# Altium PCB CANLED.PcbDoc
Units mil, origin at the board's own origin, x right, y up, seen from the top; angles counter-clockwise.
Board outline 2160 x 2780 mil, 2 copper layers (Top Layer, Bottom Layer); 11 components, 12 nets, 86 pads, 2 vias.
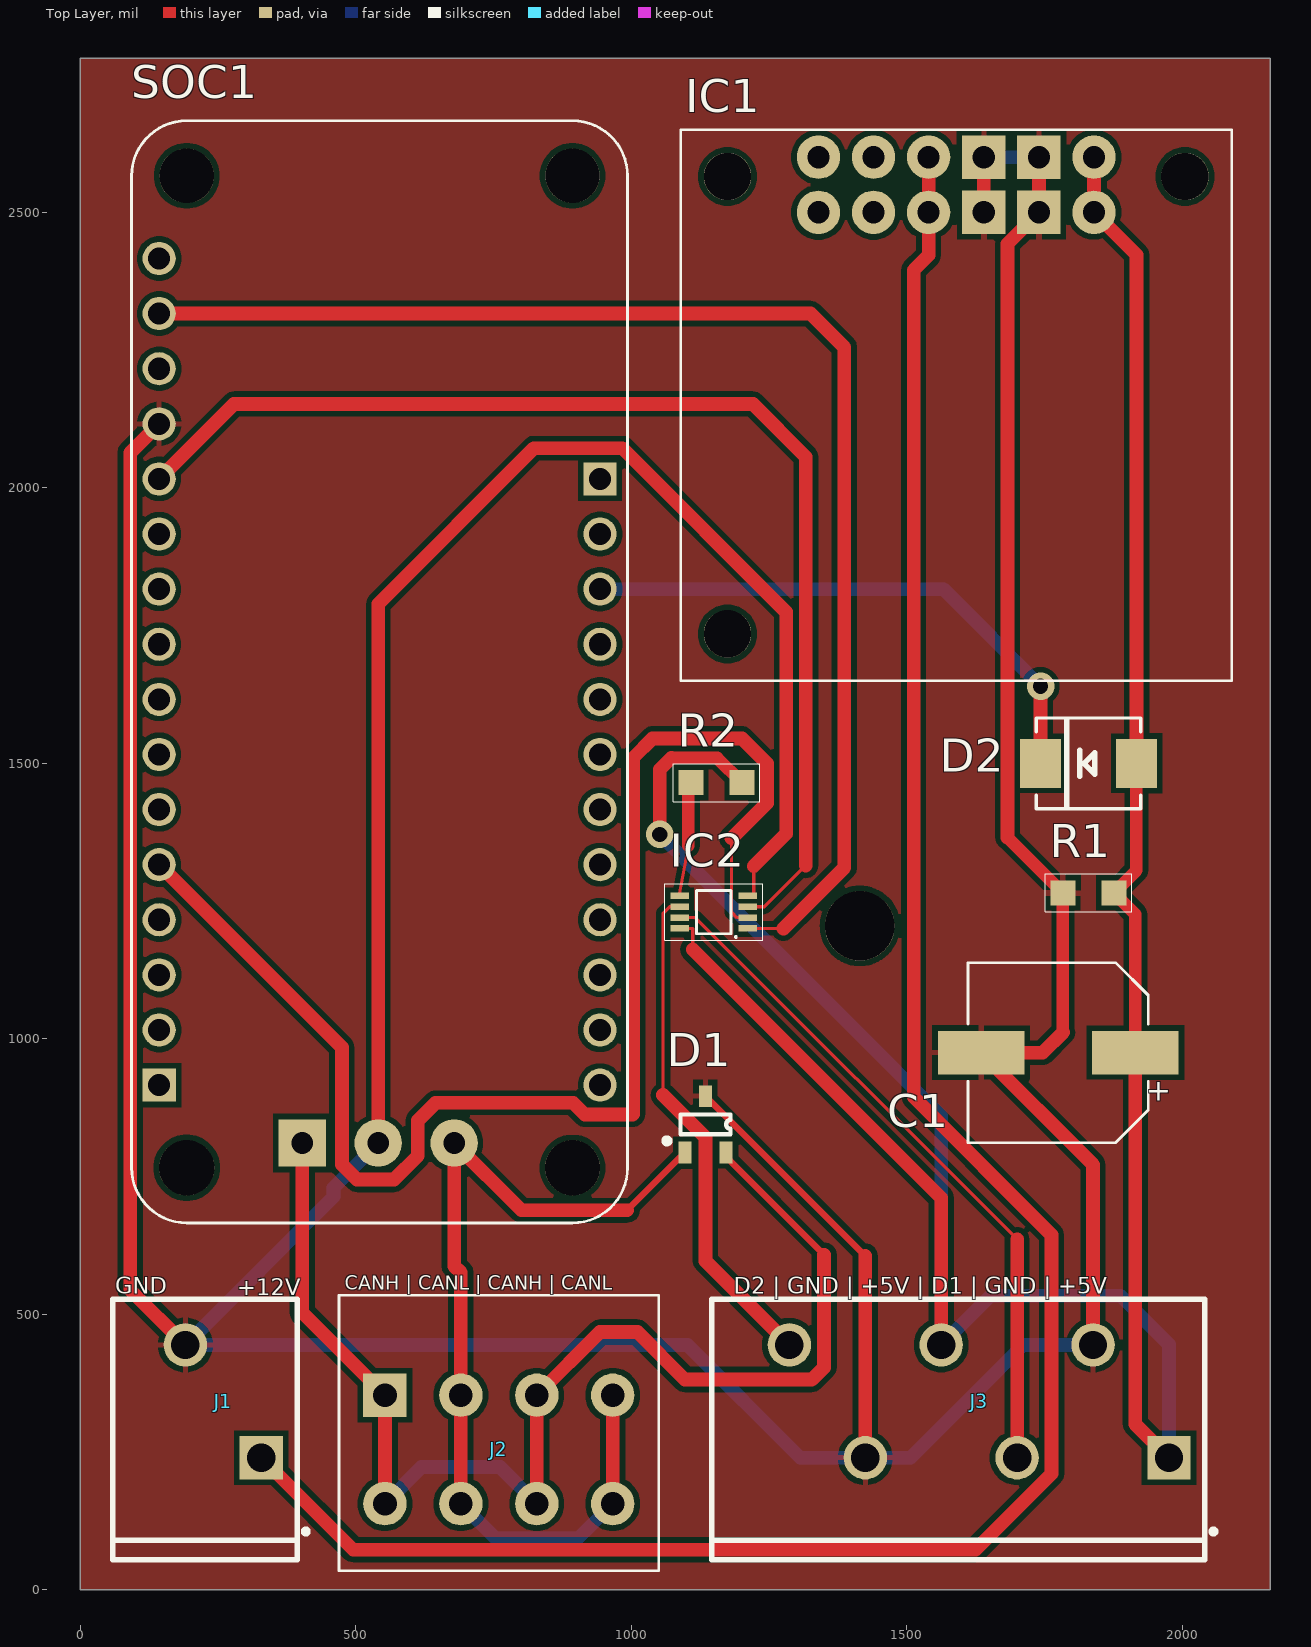
[diagram p0: Top Layer view]
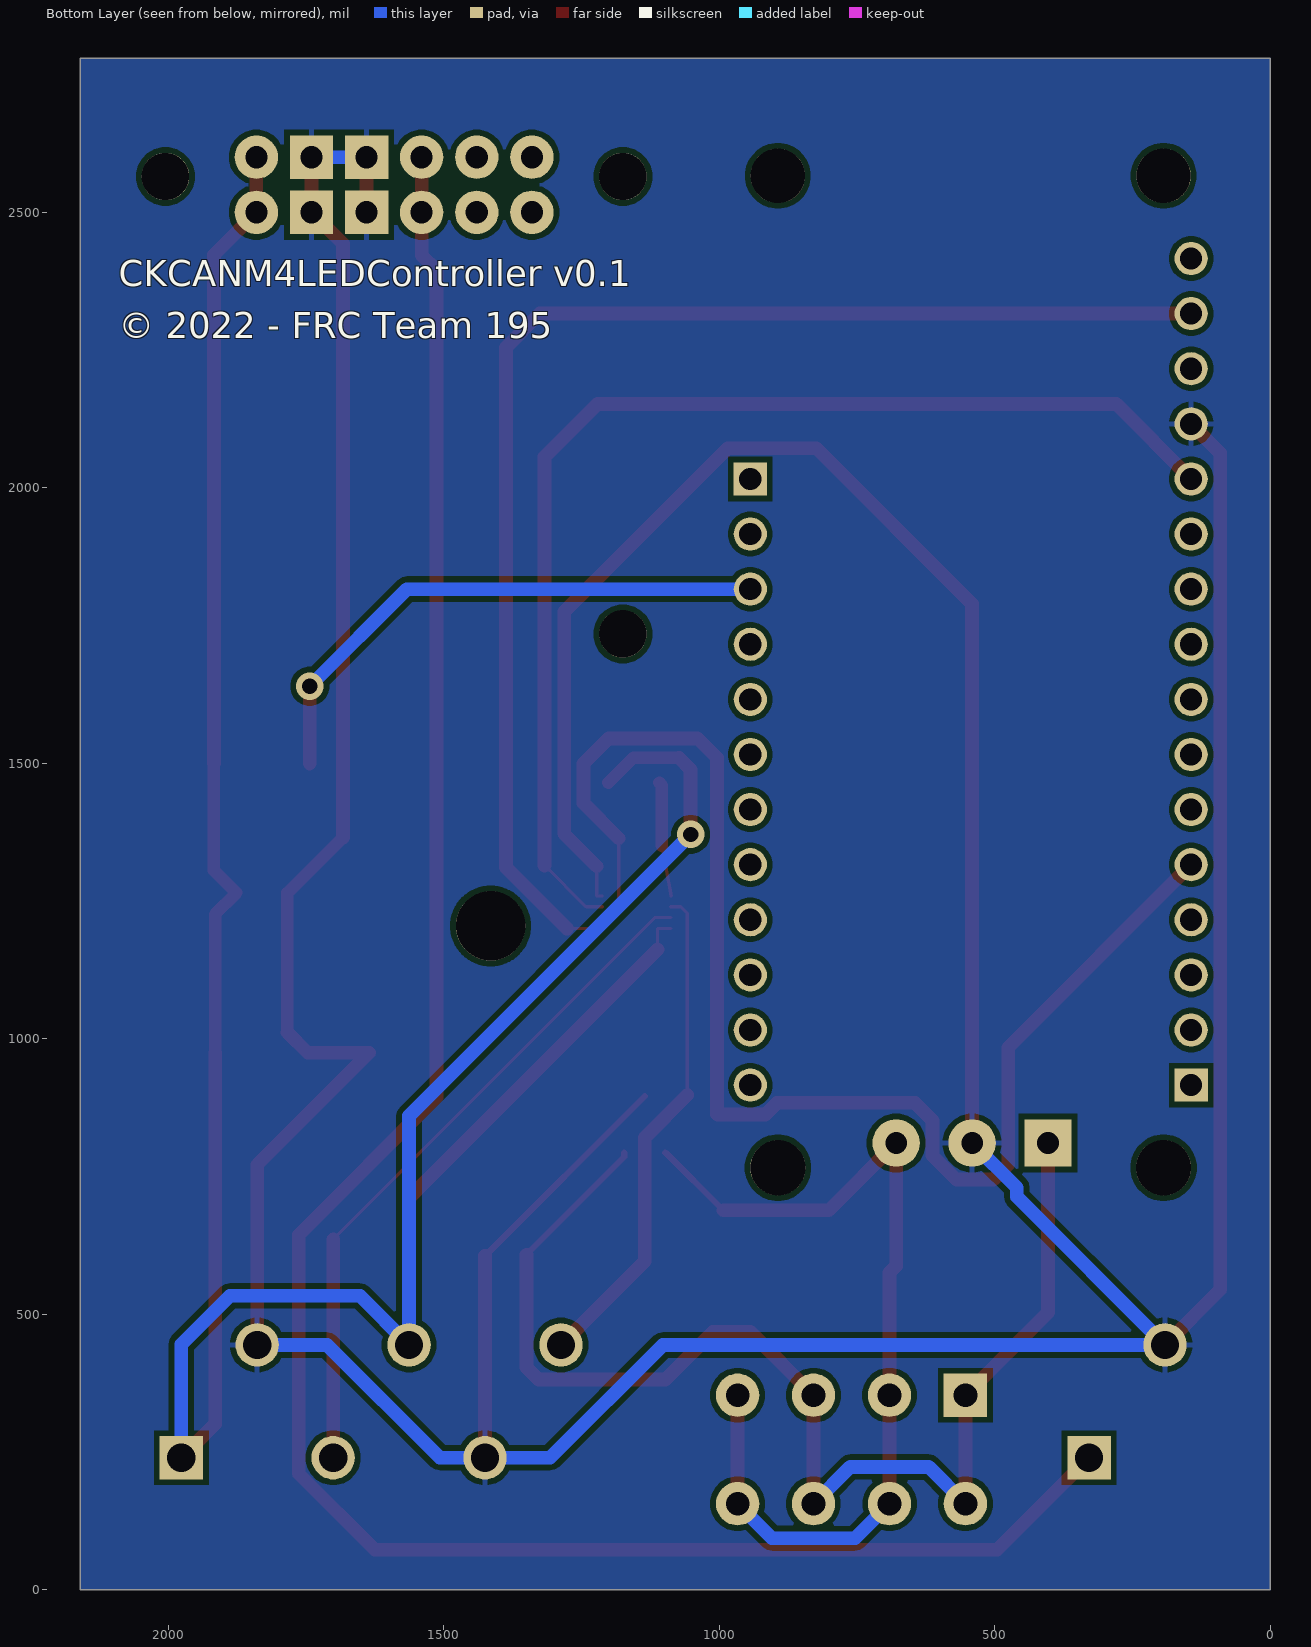
[diagram p1: Bottom Layer view, seen from below]

## Layer stack, top to bottom
Top Solder: solder mask 0.4, Solder Resist, Dk 3.5
Top Layer: signal copper 1.4
Dielectric 1: dielectric 12.6, FR-4, Dk 4.8
Bottom Layer: signal copper 1.4
Bottom Solder: solder mask 0.4, Solder Resist, Dk 3.5

## Board outline
0,0 2160,0 2160,2780 0,2780

## Design rules (kind name [scope] priority, off if disabled: settings)
Clearance [All] p1: gap=10 ignorepadtopadclearanceinfootprint=FALSE except(0: Arc-Hole Track-Hole SMDPad-Hole THPad-Hole Via-Hole Fill-Hole Poly-Hole Region-Hole Text-Hole; 5: Arc-SMDPad Track-SMDPad SMDPad-SMDPad)
PolygonConnect [All] p1: connectstyle=Relief reliefconductorwidth=10 reliefentries=4 polygonreliefangle="90 Angle" airgapwidth=10
RoomDefinition CANLED [InComponentClass('CANLED')] p1: confinementstyle=ConfineIn formatcopy=TRUE lockcomponents=FALSE outline 10,-5 2165,-5 2165,2770 10,2770
RoutingVias [All] p1: holewidth=28 width=50 viastyle="Through Hole" minholewidth=28 minwidth=50 maxholewidth=28 maxwidth=50
SMDNeckDown [All] p1: percent=50.000
SolderMaskExpansion [All] p1: expansion=4 istentingtop=FALSE
Width [All] p1: maxlimit=50 minlimit=5 preferedwidth=25 minimp=50.000000 maximp=50.000000 favimp=50.000000
30 further rules are at their usual default settings.

## Components (designator, comment, footprint, x,y, rotation, side; value= is the part's Value field where it differs from the comment)
C1 "470uF" CAP_EEE0JA471UAP 1775,975 r180 top
D1 "DESD2CAN2SOQ-7" SOT23-3 1135,845 r180 top
D2 "LSM115JE3/TR13" DO-214BA_MCH 1830,1500 r0 top
IC1 "D36V50Fx" D36V50FX 1340,2500 r90 top
IC2 "74LVC2T45DC,125" SOP50P310X100-8N 1150,1230 r180 top
J1 "Power" 1-2834011-2 260,342.36 r270 top
J2 "CAN" 1885200000 760,255 r0 top
J3 "LED Connector" 1-2834011-6 1631.69,342.36 r270 top
R1 "100K" RES_ERJ6ENF1003V 1830,1265 r0 top
R2 "100K" RES_ERJ6ENF1003V 1155,1465 r0 top
SOC1 "FEATHER_M4_CAN" FEATHER_M4_EXPRESS_CAN 543.66,1666.18 r270 top

## Footprints (in the part's own frame and the unit in brackets; to place one, negate y for a bottom-side part, rotate by r counter-clockwise, add the part's x,y. Pads: shape width x height; smd on the part's side, far side on the other; paste and mask are expansions set on the pad)
1-2834011-2 [mm]
  rect 2x2 hole 1.3: 1(2.6,1.75)
  round 2 hole 1.3: 2(-2.6,-1.75)
  silkscreen extent -4.7,-5.1 7.3,3.9, body extent -4.7,-5.15 7.3,3.35, height 12.94
1-2834011-6 [mm]
  rect 2x2 hole 1.3: 1(2.6,8.75)
  round 2 hole 1.3: 2(-2.6,5.25) 3(2.6,1.75) 4(-2.6,-1.75) 5(2.6,-5.25) 6(-2.6,-8.75)
  silkscreen extent -4.7,-12.32 7.3,10.9, body extent -4.73,-12.27 7.27,10.23, height 12.94
1885200000 [mm]
  round 2 hole 1.092: 1(-5.25,-2.5) 2(-1.75,-2.5) 2(-1.75,2.5) 3(1.75,-2.5) 3(1.75,2.5) 4(5.25,-2.5) 4(5.25,2.5)
  rect 2x2 hole 1.092: 1(-5.25,2.5)
  silkscreen extent -7.37,-5.59 7.37,7.11, body extent -7.37,-5.59 7.33,7.11, height 13.17
CAP_EEE0JA471UAP [mm]
  rect 4x2 smd: 1(-3.55,0) 2(3.55,0)
  silkscreen extent -4.15,-4.15 4.15,4.15, body extent -4.85,-4.15 4.85,4.15, height 10.2
D36V50FX [mm]
  round 2 hole 1.02: 1(0,-12.7) 1(2.54,-12.7) 3(0,-5.08) 3(2.54,-5.08) 4(0,-2.54) 4(2.54,-2.54) 5(0,0) 6(2.54,0)
  rect 2x2 hole 1.02: 2(0,-7.62) 2(0,-10.16) 2(2.54,-7.62) 2(2.54,-10.16)
  round 2.184 hole 2.184: 9(1.651,-16.891) 10(1.651,4.191) 11(-19.431,4.191)
  silkscreen extent -21.59,-19.05 3.81,6.35, body extent -21.59,-19.05 3.81,6.35, height 12.77
DO-214BA_MCH [mil]
  rect 74x89 smd paste+0 mask+0: 1(-87,0) 2(87,0)
  silkscreen extent -95,-82 95,82, body extent -103,-51 103,51, height 117
FEATHER_M4_EXPRESS_CAN [mm]
  rect 1.53x1.53 hole 1.02: P1_1(19.05,-10.16) P2_1(-8.89,10.16)
  round 1.53 hole 1.02: P1_2(16.51,-10.16) P1_3(13.97,-10.16) P1_4(11.43,-10.16) P1_5(8.89,-10.16) P1_6(6.35,-10.16) P1_7(3.81,-10.16) P1_8(1.27,-10.16) P1_9(-1.27,-10.16) P1_10(-3.81,-10.16) P1_11(-6.35,-10.16) P1_12(-8.89,-10.16) P1_13(-11.43,-10.16) P1_14(-13.97,-10.16) P1_15(-16.51,-10.16) P1_16(-19.05,-10.16) P2_2(-6.35,10.16) P2_3(-3.81,10.16) P2_4(-1.27,10.16) P2_5(1.27,10.16) P2_6(3.81,10.16) P2_7(6.35,10.16) P2_8(8.89,10.16) P2_9(11.43,10.16) P2_10(13.97,10.16) P2_11(16.51,10.16) P2_12(19.05,10.16)
  rect 2.184x2.184 hole 1: P3_1(21.717,-3.564)
  round 2.184 hole 1: P3_2(21.717,-0.063) P3_3(21.717,3.437)
  round 2.5 hole 2.5: P$1(-22.86,8.89) P$2(-22.86,-8.89)
  round 2.54 hole 2.54: ""(22.86,8.89) ""(22.86,-8.89)
  silkscreen extent -25.4,-11.43 25.4,11.43, body extent -25.46,-11.43 25.4,11.43, height 9.89
RES_ERJ6ENF1003V [mm]
  rect 1.15x1.15 smd: 1(-1.175,0) 2(1.175,0)
  silkscreen extent -2,-0.87 2,0.87, body extent -1,-0.63 1,0.63, height 0.61
SOP50P310X100-8N [mm]
  rect 0.85x0.3 smd: 1(-1.575,0.75) 2(-1.575,0.25) 3(-1.575,-0.25) 4(-1.575,-0.75) 5(1.575,-0.75) 6(1.575,-0.25) 7(1.575,0.25) 8(1.575,0.75)
  silkscreen extent -2.25,-1.3 2.25,1.3, body extent -1.55,-1 1.55,1, height 1
SOT23-3 [mm] "SOT23-3"
  rect 0.6x1 smd: 1(0.95,1.3) 2(-0.95,1.3) 3(0,-1.3)
  silkscreen extent -1.15,-0.45 1.9,0.89, body extent -1.45,-1.4 1.45,1.4, height 1.3

## Part data
C1: library part EEE0JA471UAP, "470ÂµF 6.3V Aluminum Electrolytic Capacitors Radial, Can - SMD 1000 Hrs @ 85Â°C", Package="RADIAL-2 Panasonic", Availability="In Stock", Check_prices=https://www.snapeda.com/parts/EEE-0JA471UAP/Panasonic/view-part/2352035/?ref=eda, MF=Panasonic, MP=EEE-0JA471UAP, Price=None, Purchase-URL=https://pricing.snapeda.com/search/part/EEE-0JA471UAP/?ref=eda, SnapEDA_Link=https://www.snapeda.com/parts/EEE-0JA471UAP/Panasonic/view-part/2352035/?ref=snap
D1: "ESD Suppressor Diode TVS Bi-Dir 24V Automotive 3-Pin SOT-23 T/R", Case/Package=TO-236-3, Clamping Voltage=41V, Manufacturer=Diodes, Max Operating Temperature=150°C, Min Breakdown Voltage=25.4V, Min Operating Temperature=-65°C, Peak Pulse Current=5A, Peak Pulse Power=230W, Power Line Protection=No, Resistor Type=Zener, Reverse Standoff Voltage=24V, Supplier Part Number 1=DESD2CAN2SOQ-7DICT-ND, Category="TVS Diodes", ComponentLink1Description=http://www.farnell.com/datasheets/2814365.pdf?src-supplier=Farnell, ComponentLink1URL=http://www.farnell.com/datasheets/2814365.pdf?src-supplier=Farnell, ComponentLink2Description=http://www.mouser.com/ds/2/115/DESD2CAN2SOQ-520157.pdf?src-supplier=Mouser, ComponentLink2URL=http://www.mouser.com/ds/2/115/DESD2CAN2SOQ-520157.pdf?src-supplier=Mouser, ComponentLink3Description=https://www.diodes.com/assets/Datasheets/DESD2CAN2SOQ.pdf?src-supplier=Digi-Key, ComponentLink3URL=https://www.diodes.com/assets/Datasheets/DESD2CAN2SOQ.pdf?src-supplier=Digi-Key, ComponentLink4Description=http://www.farnell.com/datasheets/2814365.pdf?src-supplier=Element14, ComponentLink4URL=http://www.farnell.com/datasheets/2814365.pdf?src-supplier=Element14, ComponentLink5Description=http://www.farnell.com/datasheets/2814365.pdf?src-supplier=Newark, ComponentLink5URL=http://www.farnell.com/datasheets/2814365.pdf?src-supplier=Newark, Manufacturer Part Number=DESD2CAN2SOQ-7, Mount="Surface Mount", Number of Bidirectional Channels=2, Packaging="Tape and Reel", Pricing 1="1=0.47000, 10=0.38300, 100=0.26050, 500=0.19536, 1000=0.14652 (USD)", RoHS=Yes, Stock 1=91038, Supplier 1=Digi-Key
D2: "No Description Available", Mfr_Name=Microchip, Copyright="Copyright (C) 2022 Ultra Librarian. All rights reserved.", Digi-Key_Part_Number_1=LSM115JE3/TR13TR-ND, Digi-Key_Part_Number_2=LSM115JE3/TR13CT-ND, Digi-Key_Part_Number_3=LSM115JE3/TR13DKR-ND, Manufacturer_Part_Number=LSM115JE3/TR13, RefDes=RefDes, Type=DEV
IC2: "Voltage Level Translator Bidirectional 1 Circuit 2 Channel 420Mbps 8-VSSOP", Package="VSSOP8-8 Nexperia USA Inc.", Availability=Good, Check_prices=https://www.snapeda.com/parts/74LVC2T45DC,125/Nexperia/view-part/287401/?ref=eda, MF="Nexperia USA", MP=74LVC2T45DC,125, Price=None, Purchase-URL=https://pricing.snapeda.com/search/part/74LVC2T45DC,125/?ref=eda, SnapEDA_Link=https://www.snapeda.com/parts/74LVC2T45DC,125/Nexperia/view-part/287401/?ref=snap
J1: library part 1-2834011-2, "Conn PC Terminal Block RCP 2 POS 3.5mm Solder ST Thru-Hole 6A/Contact Box/Carton", Contact Current Rating=6A, Manufacturer="TE Connectivity", Supplier Part Number 1=A123848-ND, Voltage Rating=300V, Approvals=UL, Category="Terminal Blocks", ComponentLink1Description=http://www.te.com/commerce/DocumentDelivery/DDEController?Action=srchrtrv&DocNm=1-1773872-7_ModularScrewlessTerminalBloc&DocType=DS&DocLang=English&src-supplier=Digi-Key, ComponentLink1URL=http://www.te.com/commerce/DocumentDelivery/DDEController?Action=srchrtrv&DocNm=1-1773872-7_ModularScrewlessTerminalBloc&DocType=DS&DocLang=English&src-supplier=Digi-Key, ComponentLink2Description=http://www.farnell.com/datasheets/2057753.pdf?src-supplier=Element14, ComponentLink2URL=http://www.farnell.com/datasheets/2057753.pdf?src-supplier=Element14, ComponentLink3Description=http://www.farnell.com/datasheets/2296738.pdf?src-supplier=Newark, ComponentLink3URL=http://www.farnell.com/datasheets/2296738.pdf?src-supplier=Newark, Connector Type=Receptacle,Connector, Contact Plating=Tin,Lead, Current Rating=6A, Lead Free="Lead Free", Manufacturer Part Number=1-2834011-2, Number of Pins=2, Number of Positions=2, Packaging=Box, Pricing 1="1=0.68000, 10=0.42600, 25=0.36440, 50=0.32780, 100=0.32090, 250=0.27308, 500=0.25942, 1000=0.23212, 5000=0.18206 (USD)", REACH SVHC=Unknown, RoHS=Yes, RoHS Compliant=Yes, Sealable="No (Without)", Stock 1=40747, Supplier 1=Digi-Key, Termination="Through Hole", Wire/Cable Gauge=14AWG
J2: library part 1885200000
J3: library part 1-2834011-6, "Conn PC Terminal Block 6 POS 3.5mm Solder ST Thru-Hole 6A/Contact Box/Carton", Contact Current Rating=6A, Manufacturer="TE Connectivity", Supplier Part Number 1=A123851-ND, Approvals=UL, Category="Terminal Blocks", ComponentLink1Description=http://www.te.com/commerce/DocumentDelivery/DDEController?Action=srchrtrv&DocNm=2834011&DocType=Customer+Drawing&DocLang=English&src-supplier=Digi-Key, ComponentLink1URL=http://www.te.com/commerce/DocumentDelivery/DDEController?Action=srchrtrv&DocNm=2834011&DocType=Customer+Drawing&DocLang=English&src-supplier=Digi-Key, Connector Type=Receptacle,Connector, Contact Plating=Tin,Lead, Lead Free="Lead Free", Manufacturer Part Number=1-2834011-6, Number of Pins=6, Packaging=Box, Pricing 1="1=1.42000, 10=1.00100, 25=0.93320, 50=0.84700, 100=0.84320, 250=0.71200, 500=0.67454, 1000=0.59959, 5000=0.49966 (USD)", RoHS=No, Sealable="No (Without)", Stock 1=4797, Supplier 1=Digi-Key, Termination="Through Hole", Wire/Cable Gauge=14AWG
R1 R2: library part ERJ6ENF1003V, Package=None, Availability=Unavailable, MP=ERJ6ENF1003V, Price=None

## Free pads (board coordinates)
  round 125.98 hole 125.98: 12(1415,1205)

## Via types
v1: diameter 50, hole 28, Top Layer to Bottom Layer, 2 vias

## Nets (pads, with @x,y where several pads share a name; then routed paths per layer and width w, separated by ;. In a path a pad name is that pad's centre, name@x,y a point inside that pad or via, vN(x,y) a via of type N, cw(c..) or ccw(c..) an arc to the next point about the centre after c; other vN are vias at no path point)
+3V3: IC2.1 SOC1.P1_15 | length 2433.5
  Top Layer w5.91: IC2.1 1276.47,1200.47
  Top Layer w25: SOC1.P1_15 1325.82,2316.18 1387,2255 1387,1311 1276.47,1200.47
+5V: C1.1 D2.2 IC1.1 IC2.8 J3.1 J3.4 R1.2 R2.2 | length 5541.9
  Top Layer w5.91: IC2.8 1112,1200.47 1112,1162.44
  Top Layer w22.64: 1073.14,1510.14 1156.12,1510.14 R2.2 ; C1.1 1914.76,1226.5 R1.2 1917,1305.74 D2.2
  Top Layer w25: v1(1052,1371) 1052,1489 1073.14,1510.14 ; 1112,1162.44 1562.8,711.65 J3.4 ; IC1.1@1840,2600 1840,2500 1917,2423 D2.2 ; C1.1 1914.76,301.42 J3.1
  Bottom Layer w25: v1(1052,1371) 1562.8,860.2 J3.4 1652.07,534 1888,534 1976.18,445.82 J3.1
+12V: IC1.3 J1.1 | length 4064.2
  Top Layer w25: J1.1 495.9,73 1625,73 1763,211 1763,644.5 1513,894.5 1513,2395 1540,2422 1540,2500 IC1.3@1540,2600
CANH: D1.2 J2.1 J2.3 SOC1.P3_1 | length 2320.9
  Top Layer w11.81: D1.2 1172.4,786 1350,608.4
  Top Layer w25: SOC1.P3_1 403.36,503.37 553.31,353.43 J2.1@553.31,156.57 ; J2.3@828.9,156.57 828.9,353.43 943.47,468 1011.47,468 1097.47,382 1328,382 1350,404 1350,608.4
  Bottom Layer w25: J2.1@553.31,156.57 619.73,223 762.47,223 J2.3@828.9,156.57
CANL: D1.1 J2.2 J2.4 SOC1.P3_3 | length 1696.6
  Top Layer w11.81: 992.78,689 D1.1
  Top Layer w25: J2.2@691.1,156.57 691.1,353.43 691.1,576 678.96,588.14 SOC1.P3_3 801.14,689 992.78,689 ; J2.4@966.69,156.57 J2.4@966.69,353.43
  Bottom Layer w25: J2.2@691.1,156.57 753.68,94 904.12,94 J2.4@966.69,156.57
GND: C1.2 D1.3 IC1.2 IC2.4 J1.2 J3.2 J3.5 R1.1 SOC1.P1_13 SOC1.P3_2 | length 9979.5
  Top Layer w5.91: IC2.4 1222.45,1259.53 1222.45,1313.39
  Top Layer w11.81: D1.3 1135,896 1425,606
  Top Layer w22.64: 1683,1365.74 R1.1 1783.74,1012
  Top Layer w25: SOC1.P1_13 91,2063.52 91,544.83 J1.2 ; SOC1.P3_2 541.16,1789.16 824,2072 984,2072 1281.4,1774.6 1281.4,1372.34 1222.45,1313.39 ; J3.5 1425,606 ; IC1.2@1640,2500 IC1.2@1640,2600 ; 1683,1365.74 1683,2443 1740,2500 IC1.2@1740,2600 ; 1783.74,1012 1746.74,975 C1.2 1838.39,771.85 J3.2
  Bottom Layer w25: SOC1.P3_2 460,730.02 460,713.62 J1.2 1102.28,444.72 1307,240 J3.5 1507,240 1711.72,444.72 J3.2 ; IC1.2@1640,2600 IC1.2@1740,2600
NetD2_1: D2.1 SOC1.P2_3 | length 1012.3
  Top Layer w25: D2.1 v1(1743,1640)
  Bottom Layer w25: SOC1.P2_3 1566.82,1816.18 v1(1743,1640)
NetIC2_2: IC2.2 SOC1.P1_5 | length 2577.5
  Top Layer w5.91: 1182.32,1364 1182.32,1229.84 1192,1220.16 IC2.2
  Top Layer w25: SOC1.P1_5 475.66,984.18 475.66,772 502.66,745 570,745 613,788 613,852 645,884 895,884 916,863 1003,863 1004,864 1004,1510.14 1039,1545.14 1201.26,1545.14 1246.4,1500 1246.4,1428.08 1182.32,1364
NetIC2_3: IC2.3 SOC1.P1_12 | length 2146.6
  Top Layer w5.91: IC2.3 1242,1239.84 1317,1314.84
  Top Layer w25: SOC1.P1_12 279.48,2152 1221,2152 1317,2056 1317,1314.84
NetIC2_5: IC2.5 R2.1 | length 209.8
  Top Layer w5.91: IC2.5 1087.03,1259.71 1104,1350.44
  Top Layer w22.64: 1104,1350.44 1104,1460.26 R2.1
NetIC2_6: IC2.6 J3.6 | length 913.1
  Top Layer w5.91: 1058,898 1058,1228 1069.84,1239.84 IC2.6
  Top Layer w25: 1058,898 1135,821 1135,596.93 J3.6
NetIC2_7: IC2.7 J3.3 | length 1250.8
  Top Layer w5.91: IC2.7 1116.84,1220.16 1700.59,636.41
  Top Layer w25: J3.3 1700.59,636.41
pads on no net: IC1.4 IC1.5 IC1.6 IC1.9 IC1.10 IC1.11 SOC1. SOC1.P1_1 SOC1.P1_2 SOC1.P1_3 SOC1.P1_4 SOC1.P1_6 SOC1.P1_7 SOC1.P1_8 SOC1.P1_9 SOC1.P1_10 SOC1.P1_11 SOC1.P1_14 SOC1.P1_16 SOC1.P2_1 SOC1.P2_2 SOC1.P2_4 SOC1.P2_5 SOC1.P2_6 SOC1.P2_7 SOC1.P2_8 SOC1.P2_9 SOC1.P2_10 SOC1.P2_11 SOC1.P2_12 SOC1.P$1 SOC1.P$2

## Polygon pours and split planes (outlines as drawn)
GND on Top Layer "GND_L01_P000" (solid, pour order 0): 0,2780 2160,2780 2160,0 0,0
GND on Bottom Layer "GND_L02_P001" (solid, pour order 1): 0,2780 2160,2780 2160,0 0,0

## Silkscreen, mask and mechanical layers (free items; w line width, h text height)
Top Overlay:
  text "CANH | CANL | CANH | CANL" at 480,545 h25
  text "GND" at 64.21,537.4 h30
  text "D2 | GND | +5V | D1 | GND | +5V" at 1186.69,537.4 h30
  text "+12V" at 285,535 h30
Bottom Overlay:
  text "CKCANM4LEDController v0.1" at 2090,2350.83 h80
  text "© 2022 - FRC Team 195" at 2090,2255.83 h80
Mechanical 15:
  the board outline again, w5

## Text inside footprints (layer, text, board x,y; h text height)
C1: Top Overlay "+" at 1980,921.66 h40 r180